# Altium PCB PCB1.PcbDoc
Units mm, origin at the board's own origin, x right, y up, seen from the top; angles counter-clockwise.
Board outline 65 x 30 mm, 2 copper layers (Top Layer, Bottom Layer), stack 1.201 mm thick; 44 components, 63 nets, 248 pads, 174 vias.
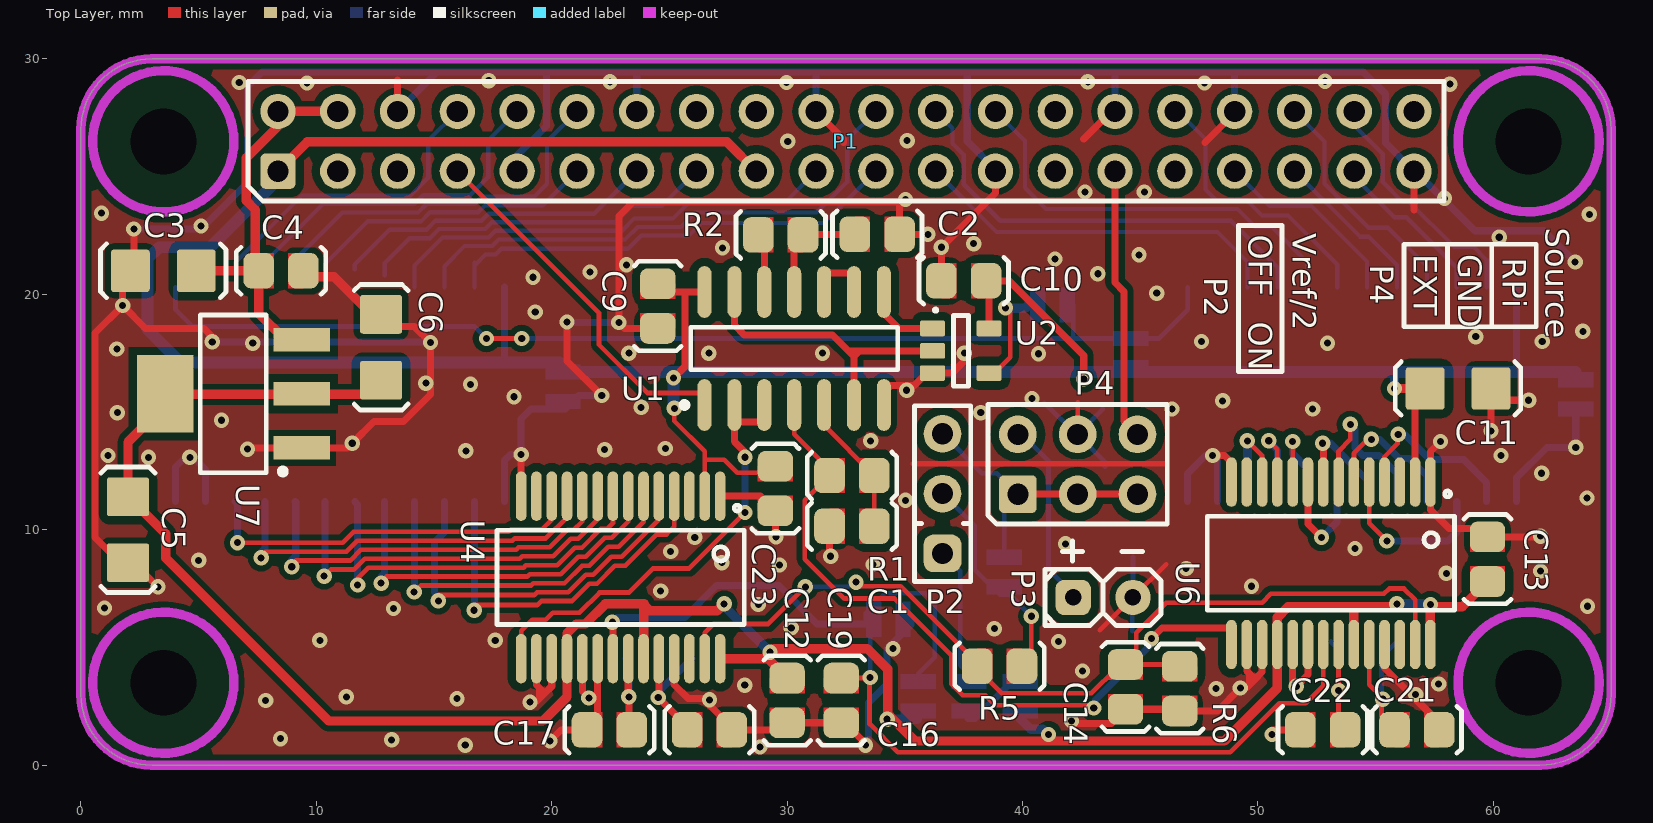
[diagram p0: Top Layer view]
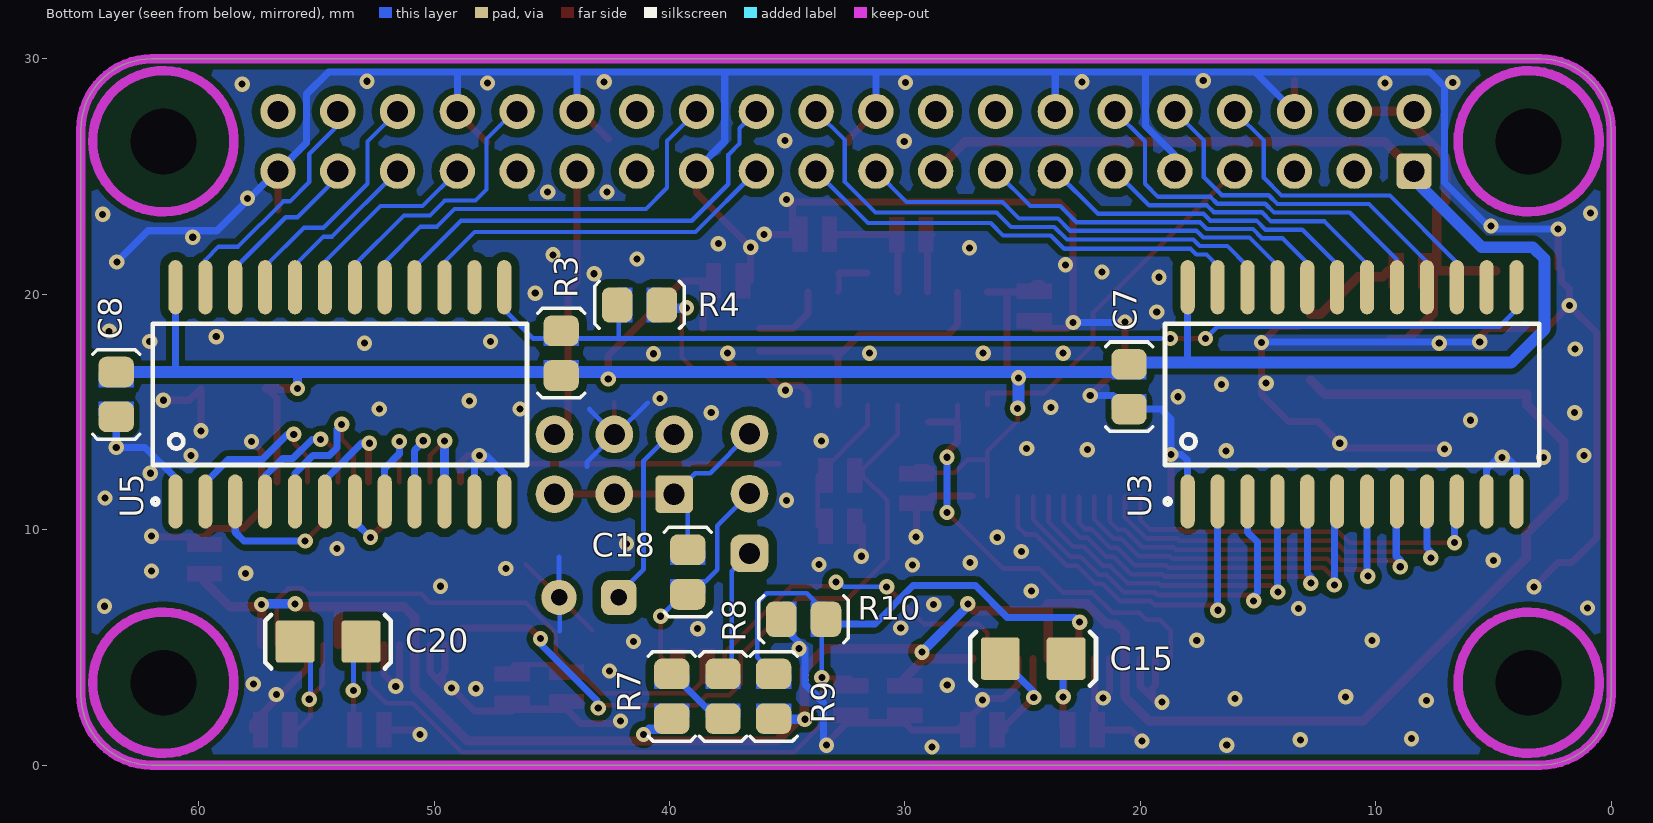
[diagram p1: Bottom Layer view, seen from below]

## Layer stack, top to bottom
Top Solder: solder mask 0.0102, Solder Resist, Dk 3.5
Top Layer: signal copper 0.0356
Dielectric 1: dielectric 1.13, FR-4, Dk 4.8
Bottom Layer: signal copper 0.0356
Bottom Solder: solder mask 0.0102, Solder Resist, Dk 3.5

## Board outline
0,3 0,27 cw(c3,27) 3,30 62,30 cw(c62,27) 65,27 65,3 cw(c62,3) 62,0 3,0 cw(c3,3)

## Design rules (kind name [scope] priority, off if disabled: settings)
Clearance Clearance_2 [Name Like '*-1111'] p1: gap=1 ignorepadtopadclearanceinfootprint=FALSE except(0: Arc-Hole Track-Hole SMDPad-Hole THPad-Hole Via-Hole Fill-Hole Poly-Hole Region-Hole Text-Hole)
Clearance Clearance_1 [InPolygon vs IsPad] p2: gap=0.356 ignorepadtopadclearanceinfootprint=FALSE except(0: Arc-Hole Track-Hole SMDPad-Hole THPad-Hole Via-Hole Fill-Hole Poly-Hole Region-Hole Text-Hole)
Clearance Clearance_3 [InPolygon] p3: gap=0.25 ignorepadtopadclearanceinfootprint=FALSE except(0: Arc-Hole Track-Hole SMDPad-Hole THPad-Hole Via-Hole Fill-Hole Poly-Hole Region-Hole Text-Hole)
Clearance [All] p4: gap=0.18 ignorepadtopadclearanceinfootprint=FALSE except(0: Arc-Hole Track-Hole SMDPad-Hole THPad-Hole Via-Hole Fill-Hole Poly-Hole Region-Hole Text-Hole)
HoleSize [All] p1 off: absolutevalues=TRUE maxlimit=2.54 minlimit=0.025 maxpercent=80.000 minpercent=20.000
PasteMaskExpansion [All] p1: expansion=0.05
PolygonConnect PolygonConnect_1 [All vs IsVia] p1: connectstyle=Direct reliefconductorwidth=0.254 reliefentries=4 polygonreliefangle="90 Angle" airgapwidth=0.254
PolygonConnect [All] p2: connectstyle=NoConnect reliefconductorwidth=0.254 reliefentries=4 polygonreliefangle="90 Angle" airgapwidth=0.254
RoomDefinition Sheet1 [InComponentClass('Sheet1')] p1 off: confinementstyle=ConfineIn formatcopy=TRUE lockcomponents=FALSE outline 411,117.625 393.601,117.625 393.601,70 411,70
RoutingVias [All] p1: holewidth=0.3 width=0.65 viastyle="Through Hole" minholewidth=0.3 minwidth=0.65 maxholewidth=0.3 maxwidth=0.65
SolderMaskExpansion [All] p1: expansion=0.102
Width [All] p1: maxlimit=3.048 minlimit=0.18 preferedwidth=0.18
28 further rules are at their usual default settings.

## Components (designator, comment, footprint, x,y, rotation, side; value= is the part's Value field where it differs from the comment)
C1 "100p" 0805RC 32.75,10.15 r0 top
C2 "N.S." 0805RC 33.825,22.55 r180 top
C3 "10u" 1206RC 3.5,21 r0 top
C4 "0.1u" 0805RC 8.5,21 r180 top
C5 "10u" 1206RC 2,10 r90 top
C6 "10u" 1206RC 12.75,17.75 r270 top
C7 "0.1u" 0805RC 20.475,16.075 r90 bottom
C8 "0.1u" 0805RC 63.5,15.75 r90 bottom
C9 "0.1u" 0805RC 24.5,19.5 r90 top
C10 "0.1u" 0805RC 37.5,20.575 r0 top
C11 "10u" 1206RC 58.5,16 r180 top
C12 "0.1u" 0805RC 30,2.75 r90 top
C13 "0.1u" 0805RC 59.75,8.75 r270 top
C14 "N.S." 0805RC 44.375,3.325 r90 top
C15 "10u" 1206RC 24.55,4.525 r0 bottom
C16 "0.1u" 0805RC 26.7,1.5 r0 top
C17 "0.1u" 0805RC 22.45,1.5 r0 top
C18 "10n" 0805RC 39.225,8.2 r270 bottom
C19 "0.1u" 0805RC 32.3,2.75 r90 top
C20 "10u" 1206RC 54.5,5.25 r0 bottom
C21 "0.1u" 0805RC 56.75,1.5 r0 top
C22 "0.1u" 0805RC 52.75,1.5 r0 top
C23 "0.1u" 0805RC 29.5,11.75 r90 top
P1 "Header 20X2" PLD-40 32.5,26.5 r0 top locked
P2 "PLS-3" PLS-3 36.6,8.995 r270 top
P3 "Header 2" SCSL-2 42.15,7.125 r180 top
P4 "Header 3X2" PBD-6 42.34,12.78 r180 top
R1 "100" 0805R 32.75,12.3 r0 top
R2 "51" 0805R 29.725,22.525 r0 top
R3 "N.S." 0805R 44.6,17.5 r270 bottom
R4 "0" 0805R 41.275,19.55 r0 bottom
R5 "1k" 0805R 39.025,4.2 r0 top
R6 "1k" 0805R 46.675,3.25 r90 top
R7 "1k" 0805R 39.9,2.925 r270 bottom
R8 "1k" 0805R 37.725,2.925 r90 bottom
R9 "150" 0805R 35.575,2.925 r270 bottom
R10 "150" 0805R 34.3,6.2 r180 bottom
U1 "74LVC14AD" M14A_N 30.3,17.7 r90 top
U2 "SN74LVC1G02DBV" SOT-23-5L 37.375,17.6 r0 top
U3 "SN74LVC841ADW" DW024_N 11,15.75 r90 bottom
U4 "AD9200AR" RS-28_N 22.925,7.975 r270 top
U5 "SN74LVC841ADW" DW024_N 54,15.75 r90 bottom
U6 "AD9200AR" RS-28_N 53.1,8.575 r270 top
U7 "LD1117S33TR" SOT223-4N 6.475,15.775 r180 top

## Footprints (in the part's own frame and the unit in brackets; to place one, negate y for a bottom-side part, rotate by r counter-clockwise, add the part's x,y. Pads: shape width x height; smd on the part's side, far side on the other; paste and mask are expansions set on the pad)
0805R [mm] "Chip Resistor"
  rrect50% 1.3x1.5 smd paste-5 mask+0.102: 1(-0.95,0) 2(0.95,0)
  Top Layer region: 0.3,-0.75 0.95,-0.75 0.95,0.75 0.3,0.75
  Top Layer region: -0.95,-0.75 -0.3,-0.75 -0.3,0.75 -0.95,0.75
  silkscreen extent -1.9,-1 1.9,1, body extent -1.15,-0.67 1.15,0.68, height 0.76
0805RC [mm] "Chip Capacitor"
  rrect50% 1.3x1.5 smd paste-5 mask+0.102: 1(-0.95,0) 2(0.95,0)
  Top Layer region: -0.95,-0.75 -0.3,-0.75 -0.3,0.75 -0.95,0.75
  Top Layer region: 0.3,-0.75 0.95,-0.75 0.95,0.75 0.3,0.75
  silkscreen extent -1.9,-1 1.9,1, body extent -0.95,-0.56 1.05,0.64, height 1.2
1206RC [mm] "Chip Capacitor"
  rrect15% 1.65x1.8 smd paste-5: 1(-1.4,0) 2(1.4,0)
  silkscreen extent -2.67,-1.14 2.67,1.14, body extent -1.6,-0.81 1.6,0.79, height 1.6
DW024_N [mm] "SOIC, 24-Leads, Body 15.4x7.5mm, Pitch 1.27mm, IPC Medium Density"
  oval 2.3x0.6 smd: 1(-4.55,6.985) 2(-4.55,5.715) 3(-4.55,4.445) 4(-4.55,3.175) 5(-4.55,1.905) 6(-4.55,0.635) 7(-4.55,-0.635) 8(-4.55,-1.905) 9(-4.55,-3.175) 10(-4.55,-4.445) 11(-4.55,-5.715) 12(-4.55,-6.985) 13(4.55,-6.985) 14(4.55,-5.715) 15(4.55,-4.445) 16(4.55,-3.175) 17(4.55,-1.905) 18(4.55,-0.635) 19(4.55,0.635) 20(4.55,1.905) 21(4.55,3.175) 22(4.55,4.445) 23(4.55,5.715) 24(4.55,6.985)
  silkscreen extent -4.67,-7.95 3,7.96, body extent -5.25,-7.82 5.15,7.58, height 2.6
M14A_N [mm] "SOIC, 14-Leads, Body 8.6x3.9mm, Pitch 1.27mm, IPC Medium Density"
  oval 2.2x0.6 smd paste-5: 1(-2.4,3.81) 2(-2.4,2.54) 3(-2.4,1.27) 4(-2.4,0) 5(-2.4,-1.27) 6(-2.4,-2.54) 7(-2.4,-3.81) 8(2.4,-3.81) 9(2.4,-2.54) 10(2.4,-1.27) 11(2.4,0) 12(2.4,1.27) 13(2.4,2.54) 14(2.4,3.81)
  silkscreen extent -2.52,-4.4 0.9,4.78, body extent -3,-4.37 3,4.38, height 1.75
PBD-6 [mm] "Connector; Header; 5x2 Position"
  rrect25% 1.6x1.6 hole 0.9: 1(2.54,1.27)
  round 1.6 hole 0.9: 2(2.54,-1.27) 3(0,1.27) 4(0,-1.27) 5(-2.54,1.27) 6(-2.54,-1.27)
  silkscreen extent -3.81,-2.54 3.81,2.54, body extent -3.81,-2.5 3.81,2.5, height 8.45
PLD-40 [mm] "Connector 20x2"
  rrect30% 1.5x1.5 hole 0.9: 1(-24.13,-1.27)
  round 1.5 hole 0.9: 2(-24.13,1.27) 3(-21.59,-1.27) 4(-21.59,1.27) 5(-19.05,-1.27) 6(-19.05,1.27) 7(-16.51,-1.27) 8(-16.51,1.27) 9(-13.97,-1.27) 10(-13.97,1.27) 11(-11.43,-1.27) 12(-11.43,1.27) 13(-8.89,-1.27) 14(-8.89,1.27) 15(-6.35,-1.27) 16(-6.35,1.27) 17(-3.81,-1.27) 18(-3.81,1.27) 19(-1.27,-1.27) 20(-1.27,1.27) 21(1.27,-1.27) 22(1.27,1.27) 23(3.81,-1.27) 24(3.81,1.27) 25(6.35,-1.27) 26(6.35,1.27) 27(8.89,-1.27) 28(8.89,1.27) 29(11.43,-1.27) 30(11.43,1.27) 31(13.97,-1.27) 32(13.97,1.27) 33(16.51,-1.27) 34(16.51,1.27) 35(19.05,-1.27) 36(19.05,1.27) 37(21.59,-1.27) 38(21.59,1.27) 39(24.13,-1.27) 40(24.13,1.27)
  silkscreen extent -25.4,-2.54 25.4,2.54, body extent -25.4,-2.54 25.4,2.54, height 8.54
PLS-3 [mm]
  rrect50% 1.6x1.6 hole 0.9: 1(0,0)
  round 1.6 hole 0.9: 2(-2.54,0) 3(-5.08,0)
  silkscreen extent -6.27,-1.19 1.19,1.19, body extent -6.35,-1.27 1.27,1.27, height 8.64
RS-28_N [mm] "SOP, 28-Leads, Body 10.2x5.3mm, Pitch 0.65mm, IPC Medium Density"
  oval 2.1x0.45 smd: 1(-3.45,4.225) 2(-3.45,3.575) 3(-3.45,2.925) 4(-3.45,2.275) 5(-3.45,1.625) 6(-3.45,0.975) 7(-3.45,0.325) 8(-3.45,-0.325) 9(-3.45,-0.975) 10(-3.45,-1.625) 11(-3.45,-2.275) 12(-3.45,-2.925) 13(-3.45,-3.575) 14(-3.45,-4.225) 15(3.45,-4.225) 16(3.45,-3.575) 17(3.45,-2.925) 18(3.45,-2.275) 19(3.45,-1.625) 20(3.45,-0.975) 21(3.45,-0.325) 22(3.45,0.325) 23(3.45,0.975) 24(3.45,1.625) 25(3.45,2.275) 26(3.45,2.925) 27(3.45,3.575) 28(3.45,4.225)
  silkscreen extent -3.07,-5.25 2,5.25, body extent -3.88,-5.16 3.88,5.17, height 2.15
SCSL-2 [mm] "2 pin SCSL connector (DS1002)"
  rrect50% 1.5x1.5 hole 0.7: 1(0,0)
  round 1.5 hole 0.7: 2(-2.54,0)
  silkscreen extent -3.73,-1.19 1.19,1.19, body extent -3.81,-1.27 1.27,1.27, height 4.4
SOT223-4N [mm] "SOT223, 4-Leads, Body 6.5x3.5mm, Pitch 2.3mm, Lead Span 7mm, IPC Medium Density"
  rect 2.4x1 smd: 1(-2.9,2.3) 2(-2.9,0) 3(-2.9,-2.3)
  rect 2.4x3.3 smd: 4(2.9,0)
  silkscreen extent -2.23,-3.35 1.4,3.42, body extent -3.54,-3.25 3.54,3.25, height 1.65
SOT-23-5L [mm] "SOT23, 5-Leads, Body 2.9x1.6mm, Pitch 0.95mm, Lead Span 2.8mm, IPC Medium Density"
  rrect25% 1.067x0.671 smd paste-5: 1(-1.2,0.95) 2(-1.2,0) 3(-1.2,-0.95) 4(1.2,-0.95) 5(1.2,0.95)
  silkscreen extent -1.14,-1.5 0.33,1.8, body extent -1.33,-1.5 1.17,1.5, height 1.1

## Part data
C1 C2 C3 C4 C5 C6 C7 C8 C9 C10 C11 C12 C13 C14 C15 C16 C17 C18 C19 C20 C21 C22 C23: library part Cap, "Capacitor", LatestRevisionDate=17-Jul-2002, LatestRevisionNote="Re-released for DXP Platform.", PackageReference=RAD-0.3, Published=8-Jun-2000, Publisher="Altium Limited"
P1: "Header, 40-Pin", LatestRevisionDate=17-Jul-2002, LatestRevisionNote="Re-released for DXP Platform.", Publisher="Altium Limited"
P2: library part "Header 3", "3-pin general header", LatestRevisionDate=17-Jul-2002, LatestRevisionNote="Re-released for DXP Platform.", Publisher="Altium Limited"
P3: "2-pin general header", LatestRevisionDate=17-Jul-2002, LatestRevisionNote="Re-released for DXP Platform.", Publisher="Altium Limited"
P4: "Header, 3-Pin, Dual row", LatestRevisionDate=17-Jul-2002, LatestRevisionNote="Re-released for DXP Platform.", Publisher="Altium Limited"
R1 R2 R3 R4 R5 R6 R7 R8 R9 R10: library part Res1, "Resistor", LatestRevisionDate=17-Jul-2002, LatestRevisionNote="Re-released for DXP Platform.", PackageReference=AXIAL-0.3, Published=8-Jun-2000, Publisher="Altium Limited"
U1: library part 74ACT14SC, "Hex Schmitt-Trigger Inverter, 14-Pin SOIC, Commercial Grade", Code_IPC=SOIC127P600-14, ComponentLink1Description="Manufacturer Link", ComponentLink1URL=http://www.fairchildsemi.com/, ComponentLink2Description=Datasheet, ComponentLink2URL=http://www.fairchildsemi.com/ds/74%2F74AC14.pdf, DatasheetVersion=Dec-1999, IC_Technology=ACT, LatestRevisionDate=13-Apr-2006, LatestRevisionNote="IPC-7351 Footprint Added.", PackageDescription="14-Pin Small Outline Integrated Circuit 1.27 mm Pitch", PackageReference=M14A, PackageVersion=2000, Published=17-Jul-2002, Publisher="Altium Limited"
U3 U5: "10-Bit Bus-Interface D-Type Latch with 3-State Outputs", Code_JEDEC=MS-013, ComponentLink1Description="Manufacturer Link", ComponentLink1URL=http://www.ti.com/, ComponentLink2Description=Datasheet, ComponentLink2URL=http://www-s.ti.com/sc/ds/sn74lvc841a.pdf, DatasheetVersion=Aug-1998, LatestRevisionDate=13-Apr-2006, LatestRevisionNote="IPC-7351 Footprint Added.", PackageDescription="24-Pin Plastic Small Outline Integrated Circuit 1.27 mm Pitch", PackageReference=DW024, PackageVersion=Mar-2000, Published=8-Jun-2000, Publisher="Altium Limited"
U4 U6: "Single 10-bit ADC Parallel 20MSPS", Manufacturer="Analog Devices", Part Number=AD9200, =http://www.analog.com/en/analog-to-digital-converters/ad-converters/ad9280/products/product.html, Channels=1, Code_JEDEC=MO-150-AH, ComponentLink1Description="Manufacturer URL", ComponentLink1URL=http://www.analog.com/en/index.html, ComponentLink2Description=Datasheet, ComponentLink2URL=http://www.analog.com/static/imported-files/data_sheets/AD9200.pdf, ComponentLink3Description="Package Specification", ComponentLink4Description="Product URL", DatasheetVersion=Rev.E, Interface=Par, Mounting Technology="Surface Mount", PackageDescription="28-Lead Shrink Small Outline Package [SSOP]", PackageReference=RS-28, PackageVersion=060106-A, Packing=Tube, Resolution (Bits)=10, RoHS=N, Throughput Rate (SPS)=20M
U7: "Fixed Low Drop Positive Voltage Regulator, 3.3V, 4-Pin SOT-223, Tape and Reel", ComponentLink1Description="Manufacturer URL", ComponentLink1URL=http://www.st.com, ComponentLink2Description=Datasheet, ComponentLink2URL=http://www.st.com/internet/com/TECHNICAL_RESOURCES/TECHNICAL_LITERATURE/DATASHEET/CD00000544.pdf, DatasheetVersion=Nov-2011, PackageDescription="4-Pin SOT-223 Package, 6.5 x 3.5 mm Body, 2.3 mm Pitch, 7 mm Lead Span", PackageReference=SOT-223, PackageVersion=2010, PartNumber=LD1117S33TR

## Free pads (board coordinates)
  round 0 hole 2.8 unplated mask+1.8: 0(3.5,3.5) 0(3.5,26.5) 0(61.5,3.5) 0(61.5,26.5)

## Via types
v1: diameter 0.65, hole 0.3, Top Layer to Bottom Layer, tented both sides, 174 vias

## Nets (pads, with @x,y where several pads share a name; then routed paths per layer and width w, separated by ;. In a path a pad name is that pad's centre, name@x,y a point inside that pad or via, vN(x,y) a via of type N, cw(c..) or ccw(c..) an arc to the next point about the centre after c; other vN are vias at no path point)
+5V: C3.2 C4.2 P1.2 P1.4 U7.3 | length 16.6
  Top Layer w0.4: C3.2 C4.2 7.55,19.2 8.675,18.075 U7.3 ; C4.2@7.406,21.144 7.406,23.594 7.028,23.972 7.028,25.798 8.37,27.14 P1.2 P1.4
A_IN: P1.29 P4.6 | length 11.6
  Top Layer w0.3: P1.29 43.93,20.495 44.3,20.125 44.3,14.63 P4.6
ADC_CLK1: U1.2 U1.3 U4.15 | length 18.9
  Top Layer w0.2: U4.15 18.7,5.7 19.175,6.175 19.75,6.175 20.05,6.475 21.175,6.475 22.03,7.33 23.28,7.33 24.3,8.35 25.827,8.35 v1(28.206,10.729) ; U1.2 U1.2@27.76,14.585 ; v1@28.2,13.3 28.2,13 28.206,13.006 v1(28.206,13.079) ; U1.2@27.76,14.585 27.76,14.575 27.75,14.575 U1.2@27.76,14.585
  Top Layer w0.3: v1@28.2,13.3 27.76,13.74 27.76,14.575 U1.3@29,14.575
  Bottom Layer w0.3: v1(28.206,10.729) v1(28.206,13.079)
ADC_CLK2: R1.1 U1.4 U6.15 | length 31.3
  Top Layer w0.2: U1.4 30.3,14.05 31.8,12.55 R1.1 30.75,11.25 30.75,8.75 32.425,7.075 34.575,7.075 36.975,4.675 36.975,3.45 37.45,2.975 38.425,2.975 38.85,2.55 v1@42.875,2.55
  Top Layer w0.3: v1(45.475,5.375) 45.925,5.825 48.8,5.825 48.875,5.75 U6.15
  Bottom Layer w0.3: v1(43.025,2.425) 43.075,2.475 43.075,2.75 45.475,5.15 v1(45.475,5.375) v1@45.4,5.3
AVCC: C5.2 C6.2 C12.2 C13.2 R7.2 R9.2 U4.18 U4.23 U4.28 U6.18 U6.23 U6.28 U7.2 U7.4 | length 100.8
  Top Layer w0.4: C6.2 12.15,15.75 3.6,15.75 U7.4 3.575,15.3 2,13.725 C5.2 2.025,11.4 3.6,9.825 3.6,8.8 10.525,1.875 19.625,1.875 20.65,2.9 U4.18 20.65,5.6 21.045,5.995 21.424,5.995 22.279,6.85 23.925,6.85 ; U4.23 23.9,6.825 24.175,6.55 27.025,6.55 v1(27.325,6.85) ; U4.28 29.175,4.525 C12.2 ; v1(29.275,4.8) 29.425,4.95 33.4,4.95 34.265,4.085 v1@34.265,1.965 ; v1(34.25,1.95) v1@34.265,1.965 ; v1@34.35,2.05 v1@34.265,1.965 ; v1@34.375,2.075 35.425,1.025 48.575,1.025 50.825,3.275 U6.18 50.825,6.275 51.275,6.725 54.075,6.725 ; U6.23 54.075,6.725 ; v1(55.9,6.85) 55.9,6.725 54.075,6.725 ; U6.28 57.325,6.725 58.675,6.725 C13.2
  Bottom Layer w0.4: v1(27.325,6.85) 27.325,6.75 v1(29.275,4.8) v1@29.35,4.8 ; v1(34.25,1.95) R9.2@35.525,1.95 ; R7.2 40.35,1.525 40.85,1.525 41.075,1.3 v1(41.1,1.3) ; v1(55.9,6.85) 57.3,6.85 v1(57.325,6.825)
CLK_IN: P1.7 U1.1 | length 15.7
  Top Layer w0.2: P1.7 22.006,19.214 22.006,17.869 24.07,15.805 26.49,15.805 U1.1
DA0: P1.21 U3.23 | length 19.8
  Bottom Layer w0.18: U3.23 U3.23@16.715,21.215 ; U3.23@16.715,21.34 U3.23@16.715,21.215 ; P1.21 31.565,23.025 26.35,23.025 25.825,22.5 23.8,22.5 23.233,21.933 17.867,21.933 17.624,21.69 17.19,21.69 U3.23@16.715,21.215
DA1: P1.22 U3.22 | length 23
  Bottom Layer w0.18: U3.22 15.445,21.195 16.3,22.05 17.475,22.05 17.75,22.325 23.116,22.325 23.651,22.86 25.485,22.86 26.1,23.475 31.25,23.475 32.55,24.775 32.55,26.55 P1.22
DA2: P1.19 U3.21 | length 19.6
  Bottom Layer w0.18: U3.21 14.175,21.222 15.363,22.41 17.326,22.41 17.616,22.7 22.982,22.7 23.502,23.22 25.145,23.22 25.85,23.925 29.925,23.925 P1.19
DA3: P1.15 U3.20 | length 15.4
  Bottom Layer w0.18: U3.20@12.905,20.8 12.905,21.33 13.955,22.38 14.824,22.38 15.214,22.77 17.177,22.77 17.467,23.06 22.71,23.06 23.4,23.75 24.67,23.75 P1.15
DA4: P1.13 U3.19 | length 13.8
  Bottom Layer w0.18: U3.19@11.635,21.05 11.635,21.26 13.115,22.74 14.675,22.74 15.065,23.13 17.028,23.13 17.318,23.42 21.8,23.42 P1.13
DA5: P1.11 U3.18 | length 12.6
  Bottom Layer w0.18: U3.18@10.365,21.05 10.365,21.29 12.175,23.1 14.45,23.1 14.84,23.49 16.879,23.49 17.169,23.78 19.62,23.78 P1.11
DA6: P1.12 U3.17 | length 16.1
  Bottom Layer w0.18: U3.17@9.095,21.05 9.095,21.47 11.1,23.475 14.316,23.475 14.691,23.85 16.729,23.85 17.019,24.14 19.24,24.14 19.8,24.7 19.8,26.5 P1.12
DA7: P1.10 U3.16 | length 14.6
  Bottom Layer w0.18: U3.16@7.825,21.05 7.825,21.375 10.285,23.835 14.167,23.835 14.542,24.21 16.535,24.21 17.3,24.975 17.3,26.54 P1.10
DA8: P1.8 U3.15 | length 13.3
  Bottom Layer w0.18: U3.15@6.555,21.05 6.555,21.355 9.395,24.195 13.995,24.195 14.75,24.95 14.75,26.53 P1.8
DB0: P1.38 U5.23 | length 10.4
  Bottom Layer w0.18: P1.38 54.09,27.166 55.3,25.956 55.3,24.775 56.125,23.95 56.4,23.95 58.325,22.025 59.15,22.025 59.715,21.46 U5.23
DB1: P1.37 U5.22 | length 7
  Bottom Layer w0.18: P1.37 54.09,24.985 55.8,23.275 56.3,23.275 58.445,21.13 U5.22
DB2: P1.36 U5.21 | length 10.3
  Bottom Layer w0.18: P1.36 52.825,26.495 52.825,24.7 54.7,22.825 55.525,22.825 57.175,21.175 U5.21
DB3: P1.35 U5.20 | length 7
  Bottom Layer w0.18: P1.35 54.33,22.45 54.7,22.45 55.905,21.245 U5.20
DB4: P1.33 U5.19 | length 8.3
  Bottom Layer w0.18: P1.33 50.49,23.75 52.275,23.75 54.635,21.39 U5.19
DB5: P1.32 U5.18 | length 11.8
  Bottom Layer w0.18: P1.32 46.605,27.77 47.775,26.6 47.775,24.45 48.24,23.985 49.54,23.985 50.175,23.35 51.275,23.35 53.365,21.26 U5.18
DB6: P1.26 U5.17 | length 18.1
  Bottom Layer w0.18: P1.26 40.1,26.52 40.1,24.525 41,23.625 49.125,23.625 49.875,22.875 50.575,22.875 52.095,21.355 U5.17
DB7: P1.24 U5.16 | length 19.2
  Bottom Layer w0.18: P1.24 37.025,27.055 37.025,26.4 37.5,25.925 37.5,24.675 39.05,23.125 48.85,23.125 50.825,21.15 U5.16
DB8: P1.23 U5.15 | length 15.9
  Bottom Layer w0.18: P1.23 38.89,22.65 48.275,22.65 49.555,21.37 U5.15
GND: C1.1 C2.1 C3.1 C4.1 C5.1 C6.1 C7.1 C8.1 C9.1 C10.1 C11.1 C12.1 C13.1 C14.1 C16.2 C17.1 C19.1 C21.2 C22.1 C23.1 P1.6 P1.9 P1.14 P1.20 P1.25 P1.30 P1.34 P1.39 P3.2 P4.4 R6.1 R10.1 U1.7 U2.3 U3.1 U3.11 U3.12 U4.1 U4.14 U4.16 U4.17 U4.19 U4.20 U4.25 U5.1 U5.11 U5.12 U6.1 U6.14 U6.16 U6.17 U6.19 U6.20 U6.25 U7.1 | length 300.1
  Top Layer w0.2: P4.4 42.34,15.415 ; 43.275,5.725 P3.2@44.675,7.125 ; P3.2@44.65,7.3 P3.2@44.665,7.3 ; P3.2 46.1,8.535
  Top Layer w0.22: 35.35,12.8 46,12.8
  Top Layer w0.3: v1(2.25,22.775) 2.25,21.15 C3.1 2.1,20.55 1.775,20.225 v1(1.775,19.525) ; v1(3.275,7.575) 2.25,8.6 C5.1 1.675,8.6 0.6,9.675 0.6,18.35 v1(1.775,19.525) ; v1(5.58,17.979) 5.559,18 5.559,18.216 5.225,18.55 2.75,18.55 v1(1.775,19.525) ; v1@7.125,13.475 U7.1 11.325,13.475 v1(11.525,13.675) 12.45,14.6 13.7,14.6 14.85,15.75 v1(14.85,17.95) 14.175,18.625 C6.1@13.275,18.625 ; P1.6 13.45,29.1 ; U4.14 v1(18.7,13.2) ; v1(19.075,2.675) 19.325,2.675 19.475,2.825 ; U4.16 19.35,3.4 19.475,3.275 ; v1(19.925,1.025) 20.4,1.5 C17.1 ; U4.17 20,3.35 19.7,3.05 ; v1(20.65,18.825) 20.65,17.175 v1(22.125,15.7) ; U4.19 21.3,3.125 v1(21.575,2.85) 21.95,2.85 ; C17.1@21.95,1.95 21.95,2.85 ; U4.20 21.95,2.85 ; C9.1 23.1,18.55 v1(22.85,18.8) 22.85,23.325 23.45,23.925 34.775,23.925 C2.1 v1(35.975,22.55) ; U4.25 25.2,3.425 25.8,2.825 26.425,2.825 C16.2@27.65,1.6 ; U4.1 28.875,11.425 C23.1 29.5,9.725 v1(29.525,9.7) ; C16.2 29.7,1.5 C12.1 C19.1 32.45,1.8 33.325,0.925 v1(33.325,0.85) ; P1.20 32.4,26.6 32.4,26.45 ; C1.1 31.8,8.925 v1(31.85,8.875) ; U1.7 34.11,15.835 34.4,16.125 35.4,16.125 35.925,16.65 U2.3 37,16.65 37.525,17.175 v1(37.525,17.5) ; C10.1 v1(36.55,22) 38.85,24.3 P1.25 ; v1(42.075,1.875) 42.18,1.77 43.77,1.77 C14.1 46.6,2.375 R6.1 48.275,2.3 v1(49.25,3.275) 49.5,3.275 49.65,3.425 ; 42.6,26.6 43.77,27.77 P1.30 ; 47.75,26.45 49.01,27.71 P1.34 ; v1(48.075,13.15) 48.575,13.15 48.875,12.85 U6.14 ; U6.16 49.525,4 49.65,3.875 ; U6.17 50.175,3.95 49.875,3.65 ; v1(50.6,1.3) 50.6,1.5 C22.1 ; U6.19 51.475,3.5 v1(51.625,3.35) 52.125,3.85 U6.20 ; U6.25 55.375,4.125 57.7,1.8 C21.2 ; 56.63,23.58 P1.39 ; v1(57.75,13.75) 57.325,13.325 U6.1 57.325,10.85 58.125,10.05 59.4,10.05 C13.1 61.975,9.7 v1(62,9.725) ; v1@59.9,14.45 C11.1 60.4,15.5 v1(61.5,15.5) ; 19.475,2.825 19.7,3.05 ; 19.475,2.825 19.475,3.275 ; 19.475,3.275 19.7,3.05 ; 49.65,3.425 49.65,3.875 ; 49.65,3.425 49.875,3.65 ; 49.65,3.875 49.875,3.65
  Top Layer w0.4: C4.1 9.7,20.75 10.75,20.75 12.35,19.15 C6.1
  Bottom Layer w0.2: 40.925,15.4 42.275,14.05 P4.4 ; 43.4,15.125 43.4,15.11 P4.4 ; 43.5,12.675 43.5,12.89 P4.4 ; 44.665,5.685 P3.2@44.665,7.3 ; P3.2 44.69,8.84
  Bottom Layer w0.3: v1(2.25,22.775) 5.1,22.775 7.075,24.75 7.075,28.825 7.7,29.45 15.13,29.45 ; U3.12 4.015,12.665 4.375,13.025 4.825,13.025 5.285,12.565 U3.11 ; v1(5.58,17.979) 14.821,17.979 v1(14.85,17.95) ; P1.6 15.13,29.45 ; U3.1 17.985,12.935 18.25,13.2 v1(18.7,13.2) 18.7,14.7 19.125,15.125 C7.1 20.575,15.125 21.15,15.7 v1(22.125,15.7) v1@22,15.575 ; P1.9 18.53,25.905 19.775,27.15 19.775,29.375 ; v1(20.65,18.825) 20.675,18.8 v1(22.85,18.8) ; P1.14 23.61,29.44 23.6,29.45 ; P1.20 31.23,29.445 31.225,29.45 ; v1@33.45,0.925 33.45,2.65 34.25,3.45 34.25,4.95 35.25,5.95 R10.1 ; P1.25 38.85,25.3 37.65,26.5 37.65,29.45 ; P1.30 43.93,29.38 ; U5.12 47.015,12.39 47.775,13.15 v1(48.075,13.15) 48.285,12.94 U5.11 ; P1.34 49.01,29.41 ; U5.1 60.985,12.21 62.275,13.5 v1(63.5,13.5) C8.1 ; v1(63.475,21.375) 62.15,22.7 59.225,22.7 56.695,25.23 P1.39 56.62,25.23 55.425,26.425 55.425,28.5 54.475,29.45 37.65,29.45 ; 15.13,29.45 23.6,29.45 ; 23.6,29.45 31.225,29.45 ; 31.225,29.45 37.65,29.45
  other v1: 28.85,0.775 16.325,0.85 13.2,1.075 8.475,1.125 7.85,2.75 26.7,2.775 15.975,2.825 11.275,2.9 56.7,3 48.225,3.25 28.2,3.4 57.675,3.45 42.55,4 34.5,4.95 41.525,5.25 10.15,5.3 17.6,5.3 38.8,5.8 30.175,5.825 13.275,6.65 1,6.675 64,6.75 28.775,6.825 24.625,7.4 49.725,7.6 58,8.15 62,8.25 46.95,8.35 29.675,8.5 33.65,8.525 27.225,8.6 5,8.7 25.05,9.075 54.125,9.2 41.825,9.4 26.075,9.675 35.025,11.25 63.975,11.35 62.05,12.4 2.875,13.075 4.625,13.075 1.15,13.15 60.325,13.15 16.35,13.35 22.25,13.4 7.075,13.425 24.825,13.45 33.55,13.775 59.9,14.2 5.975,14.65 1.55,14.975 38.225,14.975 46.35,15.125 52.325,15.125 23.8,15.2 48.5,15.475 40.4,15.575 18.4,15.65 35.075,15.925 16.55,16.175 14.65,16.225 40.675,17.475 23.275,17.5 26.675,17.5 31.5,17.5 1.525,17.675 7.3,17.925 52.95,17.925 47.6,18 62.075,18 59.25,18.2 63.8,18.425 19.3,19.25 45.7,20.05 19.2,20.725 43.2,20.875 21.625,20.95 23.175,21.25 41.375,21.5 44.95,21.675 27.25,21.975 37.925,22.15 60.25,22.425 5.1,22.9 64.075,23.4 0.875,23.45 35.025,24.025 57.925,24.075 42.65,24.35 45.175,24.35 30.025,26.5 35.1,26.525 58.15,28.925 9.6,28.975 47.725,28.975 6.725,29 29.975,29 22.475,29.025 42.775,29.025 52.85,29.05 17.325,29.075
LATCH: R3.1 R4.2 U3.13 U5.13 | length 47.4
  Top Layer w0.2: v1(17.225,18.125) v1(18.725,18.125)
  Bottom Layer w0.2: U3.13 4.015,19.36 4.737,18.638 16.712,18.638 v1(17.225,18.125) ; v1(18.725,18.125) 42.175,18.125 ; R4.2@42.15,19.55 42.15,18.15 42.175,18.125 ; U5.13 47.015,19.34 45.8,18.125 42.175,18.125
NetC1_2: C1.2 R1.2 U1.5 | length 6
  Top Layer w0.2: U1.5 31.57,14.43 R1.2 C1.2
NetC2_2: C2.2 R2.2 U1.11 | length 4.8
  Top Layer w0.2: R2.2@30.3,22.15 R2.2
  Top Layer w0.3: U1.11 R2.2@30.3,22.15 ; R2.2 30.7,22.55 C2.2
NetC14_2: C14.2 R5.1 R6.2 U4.27 U6.27 | length 41.1
  Top Layer w0.2: U4.27 26.5,5.625 26.875,6 29.2,6 v1(30.775,7.575) ; v1@32.875,7.775 v1(32.925,7.775) 33.1,7.6 34.825,7.6 37.65,4.775 37.65,4.525 39.125,3.05 42.925,3.05 44,4.125 44.225,4.125 C14.2 ; R6.2 46.6,4.275 C14.2 ; U6.27 56.675,7.025 56.2,7.5 55.575,7.5 55.35,7.275 50.55,7.275 50.175,6.9 46.095,6.9 44.825,5.63 44.825,4.725 C14.2
  Bottom Layer w0.2: v1(30.775,7.575) 32.6,7.575 32.8,7.775 v1(32.925,7.775)
NetC15_1: C15.1 C17.2 U4.22 | length 4.6
  Top Layer w0.3: U4.22 23.25,2.925 v1(23.275,2.9) C17.2@23.275,1.625
  Bottom Layer w0.3: C15.1 23.275,4.4 v1(23.275,2.9)
NetC15_2: C15.2 C16.1 U4.24 | length 5.8
  Top Layer w0.3: U4.24 24.55,2.9 v1(24.525,2.875) 25.75,1.65 C16.1
  Bottom Layer w0.3: v1(24.525,2.875) 24.525,3.1 C15.2
NetC18_1: C18.1 P2.3 P4.1 P4.3 P4.5 | length 11.9
  Top Layer w0.3: P4.1 P4.3 P4.5
  Bottom Layer w0.2: P2.3 38.275,12.4 38.91,12.4 P4.1 39.225,10.935 C18.1
NetC18_2: C18.2 P2.2 R5.2 | length 9.3
  Top Layer w0.2: R5.2 40.375,4.6 v1(40.375,6.325)
  Bottom Layer w0.2: P2.2 37.975,10.16 37.975,8.3 39.025,7.25 C18.2 39.45,7.25 v1(40.375,6.325)
NetC20_1: C20.1 C22.2 U6.22 | length 5.6
  Top Layer w0.2: C22.2@53.425,1.775 v1(53.425,3.175) U6.22
  Bottom Layer w0.2: C20.1 53.425,4.925 v1(53.425,3.175)
NetC20_2: C20.2 C21.1 U6.24 | length 6.8
  Top Layer w0.2: U6.24 54.725,3.425 55.25,2.9 55.25,2.05 C21.1
  Bottom Layer w0.2: v1(55.3,2.8) 55.25,2.85 55.25,4.6 C20.2
NetP2_1: P2.1 R8.2 | length 5.6
  Bottom Layer w0.2: P2.1 37.35,8.245 37.35,4.25 R8.2
NetP3_1: P3.1 P4.2 | length 7.8
  Bottom Layer w0.2: P4.2 39.975,14.05 41.1,12.925 41.1,8.325 P3.1@42.125,7.3
NetR2_1: R2.1 U1.12 | length 2.5
  Top Layer w0.2: R2.1 R2.1@29.03,22.27
  Top Layer w0.3: U1.12 R2.1@29.03,22.27
NetR4_1: R4.1 U2.4 | length 4.4
  Top Layer w0.2: U2.4 38.8,16.65 39.475,17.325 39.475,19.224 v1(39.274,19.425)
  Bottom Layer w0.4: v1(39.274,19.425) 39.299,19.4 40.1,19.4 R4.1@40.25,19.55
NetR7_1: R7.1 R8.1 | length 2.9
  Bottom Layer w0.3: R8.1@37.675,1.975 R8.1 R8.1@37.925,1.975 ; R8.1@37.975,1.975 R7.1@39.875,3.875
NetU1_6: U1.6 U1.13 U2.2 | length 13
  Top Layer w0.3: U1.13 27.76,18.69 28.175,18.275 31.925,18.275 32.6,17.6 ; U1.6 32.84,17.36 ; U2.2 33.08,17.6 ; 32.6,17.6 32.84,17.36 ; 32.6,17.6 33.08,17.6 ; 32.84,17.36 33.08,17.6
NetU1_8: U1.8 U2.1 | length 3.2
  Top Layer w0.3: U1.8 34.11,19.19 34.75,18.55 U2.1
NetU1_9: U1.9 U1.10 | length 2
  Top Layer w0.2: U1.9@32.8,20.9 32.8,20.14 U1.9
  Top Layer w0.3: U1.10@31.6,20.9 U1.9@32.8,20.9
NetU3_2: U3.2 U4.4 | length 16
  Top Layer w0.2: v1@16.65,6.634 16.816,6.8 19.38,6.8 19.55,6.97 20.857,6.97 21.597,7.71 21.922,7.71 22.682,8.47 23.132,8.47 24.462,9.8 24.875,9.8 25.2,10.125 U4.4
  Top Layer w0.3: v1@16.65,6.634 v1(16.706,6.579)
  Bottom Layer w0.3: v1(16.706,6.579) 16.715,6.588 U3.2
NetU3_3: U3.3 U4.5 | length 16.4
  Top Layer w0.2: v1(15.181,6.979) 15.2,6.998 15.2,7.225 19.25,7.225 19.375,7.35 20.7,7.35 21.44,8.09 21.765,8.09 22.525,8.85 22.975,8.85 24.55,10.425 U4.5
  Bottom Layer w0.3: v1(15.181,6.979) 15.181,7.181 15.025,7.336 15.025,9.475 15.445,9.895 U3.3
NetU3_4: U3.4 U4.6 | length 15.9
  Top Layer w0.2: v1(14.156,7.354) 14.432,7.63 19.118,7.63 19.218,7.73 20.543,7.73 21.288,8.475 21.6,8.475 22.4,9.275 22.837,9.275 23.9,10.338 U4.6
  Bottom Layer w0.3: v1(14.156,7.354) 14.175,7.373 U3.4
NetU3_5: U3.5 U4.7 | length 16.2
  Top Layer w0.2: v1(12.756,7.729) 12.756,7.781 12.985,8.01 18.96,8.01 19.06,8.11 20.385,8.11 21.13,8.855 21.443,8.855 22.243,9.655 22.555,9.655 23.25,10.35 U4.7
  Bottom Layer w0.2: v1@12.756,7.706 v1(12.756,7.729)
  Bottom Layer w0.3: v1(12.756,7.729) 12.756,8.006 12.905,8.155 U3.5
NetU3_6: U3.6 U4.8 | length 16.8
  Top Layer w0.2: v1(11.755,7.654) 11.75,7.659 11.75,7.93 12.21,8.39 18.803,8.39 18.903,8.49 20.228,8.49 20.973,9.235 21.285,9.235 22.085,10.035 22.36,10.035 22.6,10.275 U4.8
  Bottom Layer w0.2: v1(11.755,7.654) v1@11.755,7.795
  Bottom Layer w0.3: U3.6 11.755,11.08 v1@11.755,7.795
NetU3_7: U3.7 U4.9 | length 16.8
  Top Layer w0.2: v1(10.33,8.029) 10.612,8.31 11.593,8.31 12.053,8.77 18.645,8.77 18.745,8.87 20.07,8.87 20.815,9.615 21.128,9.615 21.95,10.437 U4.9
  Bottom Layer w0.3: v1(10.33,8.029) 10.365,8.063 U3.7
NetU3_8: U3.8 U4.10 | length 17.1
  Top Layer w0.2: v1(8.955,8.429) 8.955,8.505 9.14,8.69 11.435,8.69 11.895,9.15 18.488,9.15 18.588,9.25 19.913,9.25 20.658,9.995 20.945,9.995 21.3,10.35 U4.10
  Bottom Layer w0.3: v1(8.955,8.429) 8.955,8.705 9.125,8.875 9.125,11.17 U3.8
NetU3_9: U3.9 U4.11 | length 17.1
  Top Layer w0.2: v1(7.655,8.804) 7.655,8.88 7.845,9.07 11.278,9.07 11.738,9.53 18.331,9.53 18.431,9.63 19.744,9.63 20.65,10.536 U4.11
  Bottom Layer w0.3: v1(7.655,8.804) 7.655,9.055 7.825,9.225 U3.9
NetU3_10: U3.10 U4.12 | length 16.5
  Top Layer w0.2: v1(6.65,9.45) 11.12,9.45 11.58,9.91 18.173,9.91 18.273,10.01 19.585,10.01 20,10.425 U4.12
  Bottom Layer w0.3: U3.10 6.65,11.105 v1(6.65,9.45)
NetU5_2: U5.2 U6.4 | length 7.7
  Top Layer w0.2: U6.4 55.375,13.1 55.925,13.65 55.925,14.021 v1(55.958,14.054)
  Bottom Layer w0.3: v1(55.958,14.054) 56.221,14.054 57.3,12.975 58.75,12.975 59.715,12.01 U5.2
NetU5_3: U5.3 U6.5 | length 7.2
  Top Layer w0.2: U6.5 54.725,10.275 v1(55.475,9.525)
  Bottom Layer w0.3: v1(55.475,9.525) 58.075,9.525 58.445,9.895 U5.3
NetU5_4: U5.4 U6.6 | length 6.3
  Top Layer w0.2: U6.6 54.075,13.25 54.665,13.84 v1(54.815,13.84)
  Bottom Layer w0.3: v1(54.815,13.84) 55.185,13.84 56,13.025 56.425,13.025 57.175,12.275 U5.4
NetU5_5: U5.5 U6.7 | length 7.2
  Top Layer w0.2: U6.7 53.425,13.337 53.925,13.837 v1(53.925,14.475)
  Bottom Layer w0.3: v1(53.925,14.475) 54.125,14.275 54.125,13.475 54.45,13.15 55.15,13.15 55.905,12.395 U5.5
NetU5_6: U5.6 U6.8 | length 5.1
  Top Layer w0.3: v1(52.75,13.675) 52.775,13.65 U6.8
  Bottom Layer w0.3: v1(52.75,13.675) 53.075,13.675 54.635,12.115 U5.6
NetU5_7: U5.7 U6.9 | length 4.4
  Top Layer w0.3: U6.9 52.125,10.25 v1(52.7,9.675)
  Bottom Layer w0.3: v1(52.7,9.675) 53.365,10.34 U5.7
NetU5_8: U5.8 U6.10 | length 4.5
  Top Layer w0.2: U6.10 v1(51.475,13.75)
  Bottom Layer w0.3: v1(51.475,13.75) 51.475,13.225 52.095,12.605 U5.8
NetU5_9: U5.9 U6.11 | length 4.7
  Top Layer w0.2: v1@50.425,13.811 v1(50.457,13.779) 50.825,13.411 U6.11
  Bottom Layer w0.3: v1(50.457,13.779) 50.45,13.772 50.45,13.75 50.825,13.375 U5.9
NetU5_10: U5.10 U6.12 | length 4.6
  Top Layer w0.2: v1(49.55,13.775) 50.175,13.15 U6.12
  Bottom Layer w0.4: v1(49.55,13.775) 49.555,13.77 U5.10
REF_T: C19.2 R9.1 R10.2 U4.21 U6.21 | length 49.6
  Top Layer w0.2: C19.2@32.85,3.15 C19.2 v1@33.5,3.7 ; v1(33.525,3.725) v1@33.5,3.7 ; U6.21 52.775,3.375 52.025,2.625 50.9,2.625 48.82,0.545 34.705,0.545 33.5,1.75 v1@33.5,3.7
  Top Layer w0.3: v1(22.575,6.075) 22.6,6.05 U4.21
  Bottom Layer w0.2: R10.2 33.35,6.475 34.175,7.3 35.875,7.3 36.275,6.9 36.275,4.575 R9.1 ; v1(33.525,3.725) R10.2@33.525,6.025
  Bottom Layer w0.3: v1(22.575,6.075) 22.775,6.275 25.65,6.275 27,7.625 29.65,7.625 31.275,6 R10.2@33.325,6
VCC: C7.2 C8.2 C9.2 C10.2 C11.2 C23.2 P1.1 P1.17 R3.2 U1.14 U2.5 U3.24 U4.2 U5.24 U6.2 | length 130.4
  Top Layer w0.2: v1(25.206,15.154) 25.206,14.619 26.5,13.325 26.5,12.975 ; U4.2 26.5,12.975 ; C23.2 29.025,12.7 28.75,12.425 27.875,12.425 27.325,12.975 26.5,12.975
  Top Layer w0.3: C9.2@24.2,20.45 C9.2 24.85,20.1 25.67,20.1 ; v1(25.175,16.45) 25.67,16.945 25.67,20.1 ; U1.14 25.67,20.1 ; U2.5 38.575,20.45 C10.2 39.425,20.575 42.6,17.4 v1(42.6,16.4) ; U6.2 56.675,15.575 C11.2
  Top Layer w0.4: P1.1 9.615,26.475 27.445,26.475 P1.17 ; v1(55.8,16) C11.2
  Bottom Layer w0.3: 17.985,17.05 17.985,17.1 U3.24 ; v1(42.6,16.4) 42.6,16.65 v1@42.65,16.7 ; U5.24 60.985,16.815 61.1,16.7
  Bottom Layer w0.4: v1(55.8,16) 55.8,16.7
  Bottom Layer w0.5: P1.1 8.37,24.87 5.5,22 3.325,22 2.825,21.5 2.825,18.525 4.25,17.1 17.985,17.1 C7.2@20.325,17.1 ; C7.2@20.125,17.075 20.5,16.7 42.65,16.7 55.8,16.7 61.1,16.7 C8.2 ; v1(25.175,16.45) 25.175,15.185 v1(25.206,15.154)
pads on no net: P1.3 P1.5 P1.16 P1.18 P1.27 P1.28 P1.31 P1.40 U3.14 U4.3 U4.13 U4.26 U5.14 U6.3 U6.13 U6.26

## Polygon pours and split planes (outlines as drawn)
GND on Bottom Layer "B1p" (solid, remove dead copper, pour order 2): 0,30 0,0 65,0 65,30
GND on Top Layer "B1p" (solid, remove dead copper, pour order 4): 0,0 0,30 65,30 65,0

## Keep-outs
Keep-Out Layer:
  circle w0.4: c3.5,26.5 r3
  circle w0.4: c3.5,3.5 r3
  circle w0.4: c61.5,3.5 r3
  circle w0.4: c61.5,26.5 r3
  lines w0.4: 0,3 ccw(c3,3) 3,0 62,0 ccw(c62,3) 65,3 65,27 ccw(c62,27) 62,30 3,30 ccw(c3,27) 0,27 0,3

## Silkscreen, mask and mechanical layers (free items; w line width, h text height)
Top Overlay:
  lines w0.2: 41.687,9.075 42.562,9.075 ; 42.125,8.675 42.125,9.525 ; 44.225,9.075 45.1,9.075 ; 49.175,22.9 49.175,16.725 51.025,16.725 51.025,22.9 ; 49.175,22.925 51.025,22.925 ; 56.2,22.1 56.2,18.625 61.825,18.625 61.825,22.125 56.2,22.125 ; 58.05,18.675 58.05,22.1 ; 59.925,18.625 59.925,22.125
  text "Source" at 62.225,22.825 h1 r270
  text "Vref/2" at 51.475,22.6 h1 r270
  text "OFF" at 49.6,22.525 h1 r270
  text "EXT" at 56.625,21.7 h1 r270
  text "GND" at 58.5,21.7 h1 r270
  text "RPi" at 60.4,21.55 h1 r270
  text "P4" at 54.775,21.25 h1 r270
  text "P2" at 47.725,20.725 h1 r270
  text "ON" at 49.6,18.825 h1 r270
Shape:
  the board outline again, w0.1